# EAGLE board pclone-control (EAGLE 6.6.0)
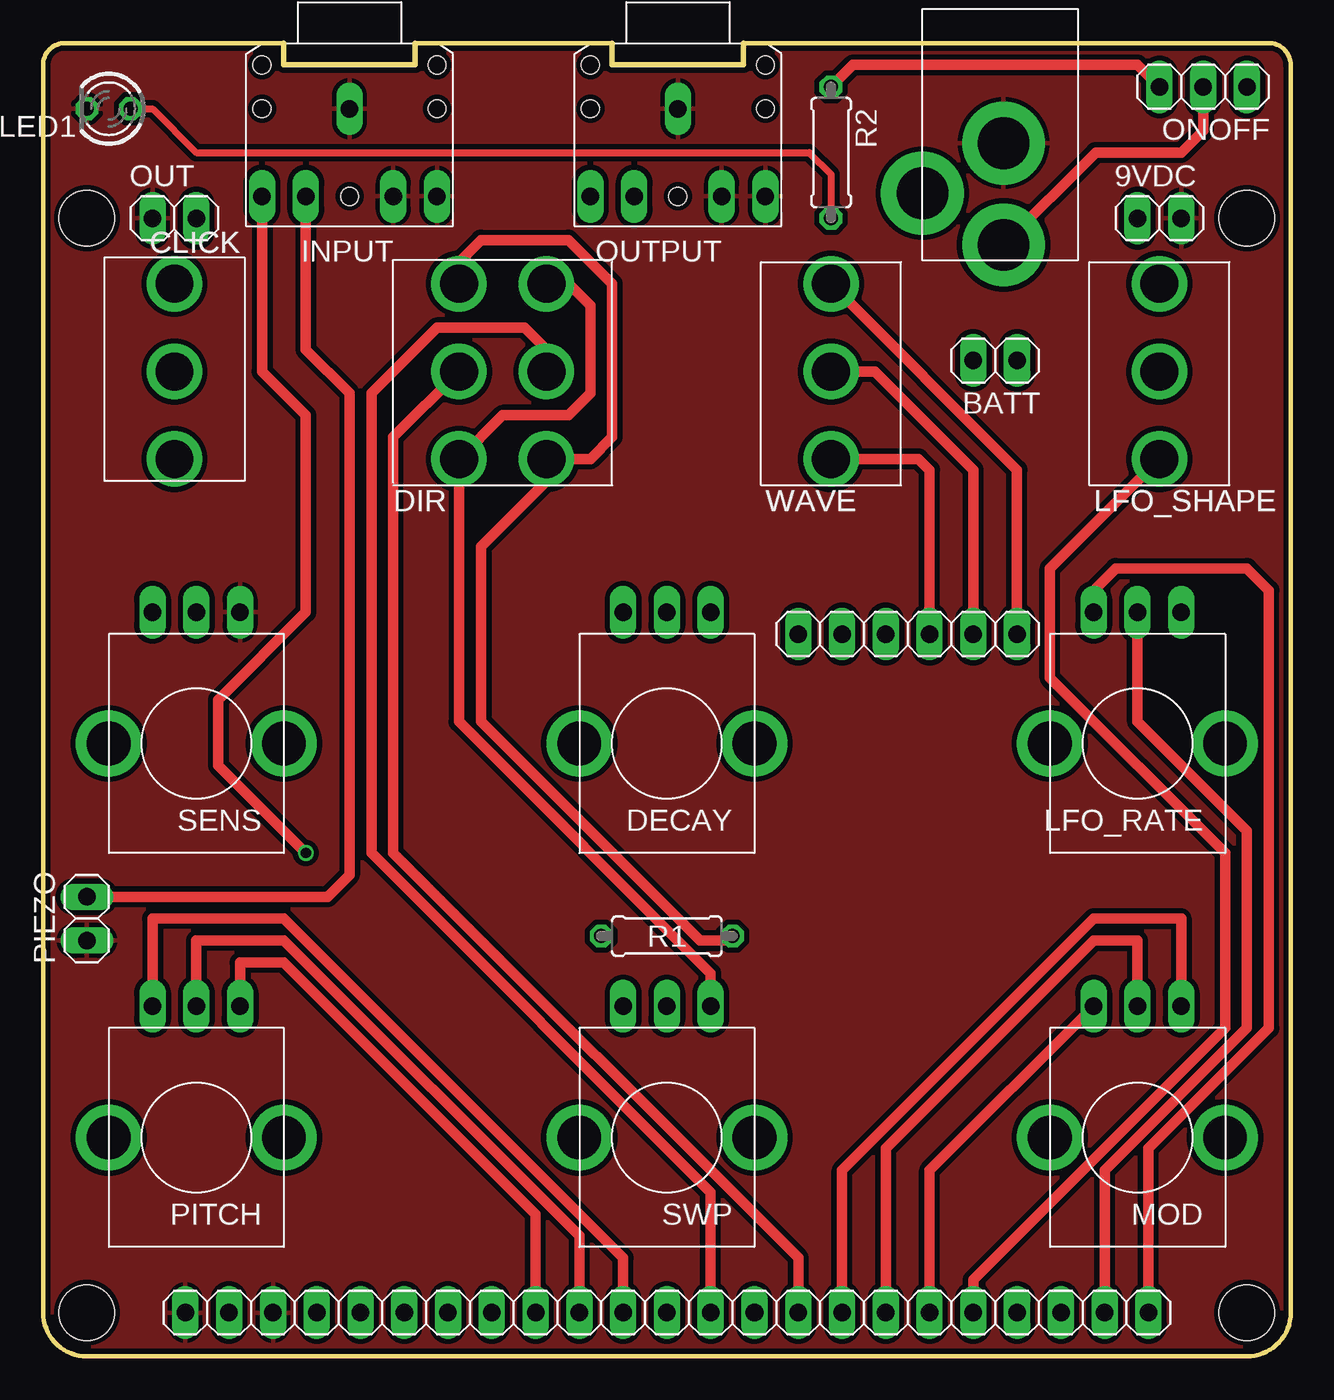
[diagram p0: board, top side]
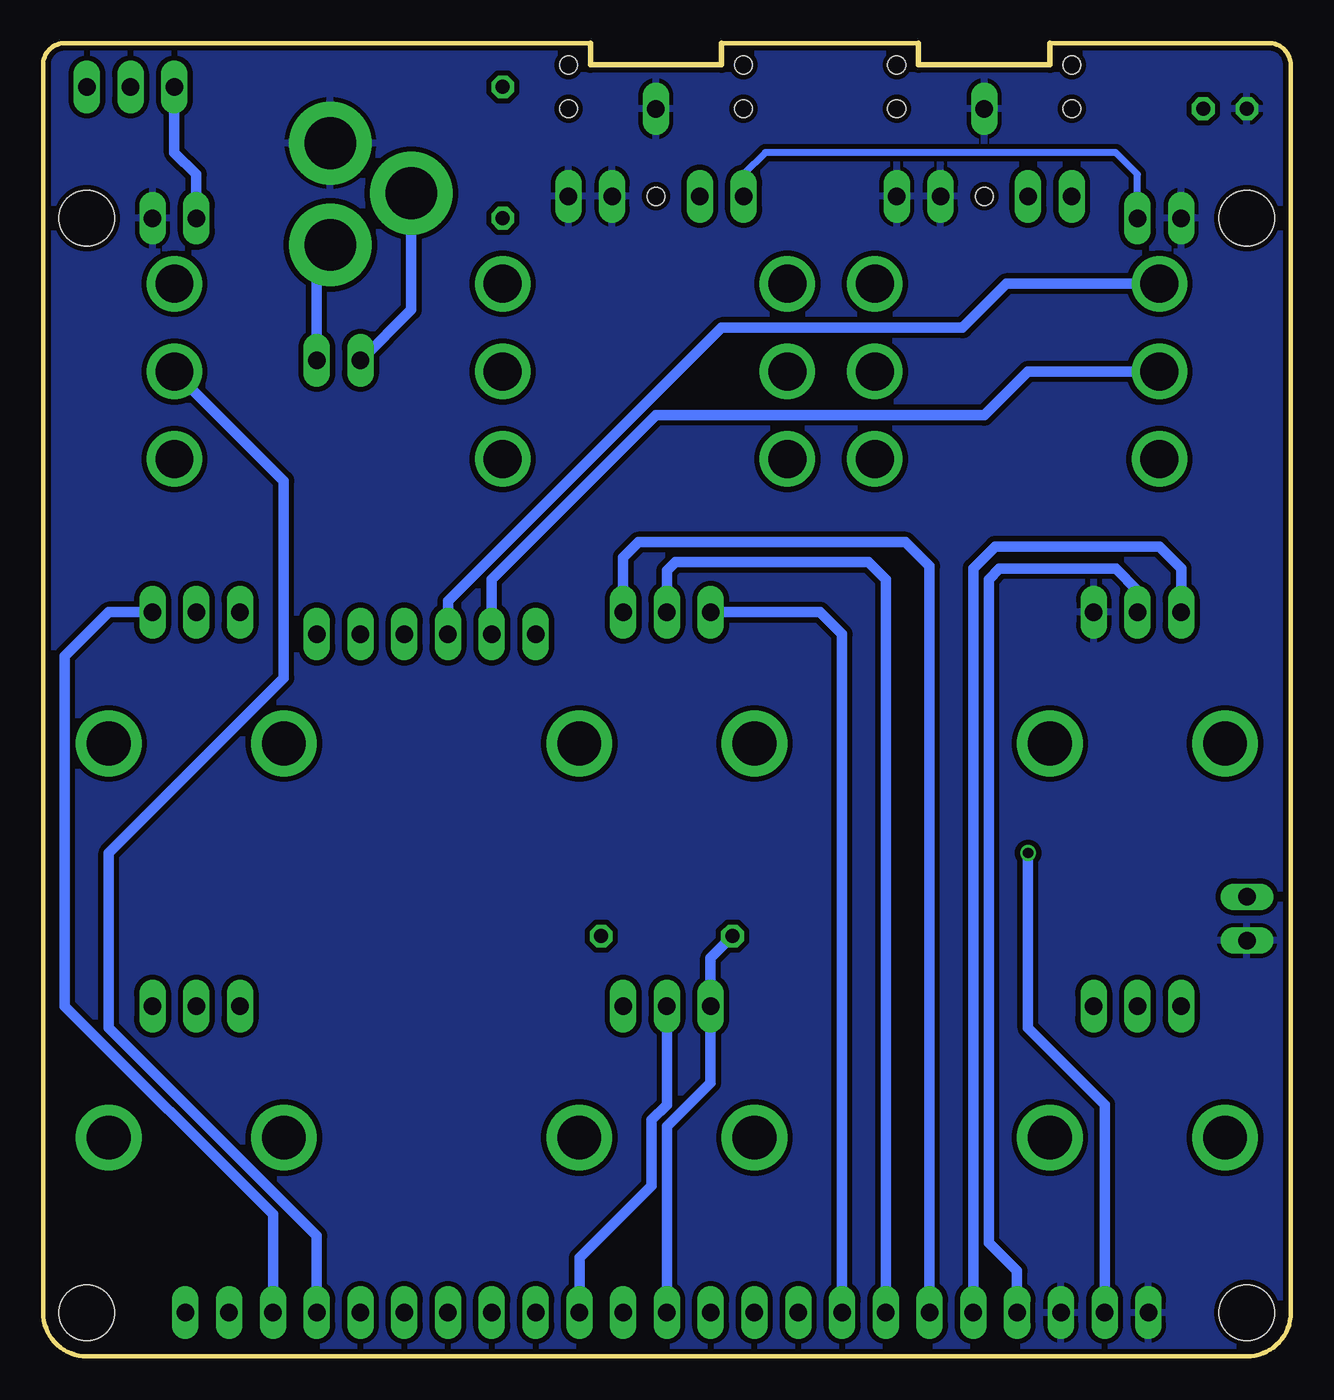
[diagram p1: board, bottom side, seen from below]

Size 72.39 x 76.2 mm. Coordinates in mm from the lower left corner, seen from the top.
Outline: 1.27,76.2 13.97,76.2 13.97,74.93 21.59,74.93 21.59,76.2 33.02,76.2 33.02,74.93 40.64,74.93 40.64,76.2 71.12,76.2 arc-90 72.39,74.93 72.39,2.54 arc-90 69.85,0 2.54,0 arc-90 0,2.54 0,74.93 arc-90 1.27,76.2
Copper layers (1*16): Top 0.035mm / dielectric 1.5mm / Bottom 0.035mm
Design rules "ITEADstudio_DRC": minimum track width 6mil, minimum drill 12mil, track to track 6mil, track to pad 6mil, pad to pad 6mil, via to via 6mil, smd to smd 0mil, copper to edge 10mil, drill to drill 10mil, minimum pad ring 10mil, minimum via ring 6mil, stop-mask expansion 2mil, vias tented up to drill 100mil, thermal gap 10mil
Holes 3.2 mm at 69.85,66.04 69.85,2.54 2.54,2.54 2.54,66.04

## Footprints (pad centres in the part's own frame; a part is rotated, then mirrored left to right if it is on the bottom)
1X02 = drill 1.016 long: 1 -1.27,0; 2 1.27,0
SPDT_SW = drill 2.2: A1 0,5.08; B1 0,-5.08; COM1 0,0
SMALL_ALPS_POT = drill 1.016 long: A -2.54,-7.62; B 2.54,-7.62; W 0,-7.62 | drill 2.54 pad 3.81: GND@1 -5.08,0; GND@2 5.08,0
DPDT_SW = drill 2.2: A1 -2.54,5.08; A2 2.54,5.08; B1 -2.54,-5.08; B2 2.54,-5.08; COM1 -2.54,0; COM2 2.54,0
TRUCONNECTJACK = drill 1.016 long: RING -1.27,-5.08; RING_NC -1.27,-2.54; SLEEVE 3.81,0; TIP -1.27,5.08; TIP_NC -1.27,2.54 | hole 1.016: 3.81,5.08; 6.35,5.08; 3.81,-5.08; 6.35,-5.08; -1.27,0
1X03 = drill 1.016 long: 1 -2.54,0; 2 0,0; 3 2.54,0
1X04 = drill 1.016 long: 1 -3.81,0; 2 -1.27,0; 3 1.27,0; 4 3.81,0
LED3MM = drill 0.813 octagon: A -1.27,0; K 1.27,0
0207/7 = drill 0.813 octagon: 1 -3.81,0; 2 3.81,0
PJ-102A = drill 3 pad 4.8: RING 0.1,-3.39; RING_SW -4.6,-6.29; TIP 0.1,-9.29

## Placement (x,y rotation side)
9VDC  [1X02]  64.77,66.04 0 top
BATT  [1X02]  55.25,57.78 180 top
CLICK  SPDT_SW  [SPDT_SW]  7.62,57.15 180 top
DECAY  ALPS_POT_SMALL  [SMALL_ALPS_POT]  36.2,35.56 180 top
DIR  DPDT_SW  [DPDT_SW]  26.67,57.15 0 top
IN  [1X02]  9.52,2.54 0 top
INPUT  TRUCONNECTJACK  [TRUCONNECTJACK]  17.78,68.58 90 top
J1  [1X03]  15.88,2.54 0 top
J2  [1X03]  23.49,2.54 0 top
J3  [1X03]  31.12,2.54 0 top
J4  [1X04]  40.01,2.54 0 top
J5  [1X03]  48.89,2.54 0 top
J6  [1X02]  55.25,2.54 0 top
J7  [1X03]  61.59,2.54 0 top
J8  [1X03]  46.35,41.91 180 top
J9  [1X03]  53.98,41.91 0 top
LED1  [LED3MM]  3.81,72.39 180 top
LFO_RATE  ALPS_POT_SMALL  [SMALL_ALPS_POT]  63.5,35.56 180 top
LFO_SHAPE  SPDT_SW  [SPDT_SW]  64.77,57.15 0 top
MOD  ALPS_POT_SMALL  [SMALL_ALPS_POT]  63.5,12.7 180 top
ONOFF  [1X03]  67.31,73.66 180 top
OUT  [1X02]  7.62,66.04 0 top
OUTPUT  TRUCONNECTJACK  [TRUCONNECTJACK]  36.83,68.58 90 top
PIEZO  [1X02]  2.54,25.4 90 top
PITCH  ALPS_POT_SMALL  [SMALL_ALPS_POT]  8.89,12.7 180 top
R1  500R  [0207/7]  36.2,24.38 180 top
R2  4k7  [0207/7]  45.72,69.85 270 top
SENS  ALPS_POT_SMALL  [SMALL_ALPS_POT]  8.89,35.56 180 top
SWP  ALPS_POT_SMALL  [SMALL_ALPS_POT]  36.2,12.7 180 top
U$4  2.1MMJACKTHM  [PJ-102A]  55.63,73.79 0 top
WAVE  SPDT_SW  [SPDT_SW]  45.72,57.15 0 top

## Library data of the parts
9VDC BATT IN J1-J9 ONOFF OUT PIEZO = pinhead
CLICK DIR INPUT LFO_SHAPE OUTPUT WAVE = jason_eagle6
DECAY LFO_RATE MOD PITCH SENS SWP = jasons_stuff
LED1 = led
R1 R2 = rcl
U$4 = adafruit

## Nets
GND: 9VDC.2 IN.1 INPUT.RING INPUT.RING_NC INPUT.SLEEVE J1.1 LED1.K OUT.1 OUTPUT.RING OUTPUT.RING_NC OUTPUT.SLEEVE PIEZO.1 SENS.A U$4.RING
N$1: J4.1 R1.2 SWP.B
N$2: DIR.A1 DIR.B2 R1.1
N$3: DIR.A2 DIR.B1 SWP.A
N$4: DIR.COM1 J4.4
N$5: DIR.COM2 J4.2
N$6: J4.3 SWP.W
N$7: J9.1 WAVE.B1
N$8: J9.3 WAVE.A1
N$9: J9.2 WAVE.COM1
N$10: CLICK.B1 J8.1
N$11: CLICK.COM1 J8.2
N$12: J6.1 LFO_SHAPE.B1
N$13: J6.2 LFO_SHAPE.COM1
N$14: J1.2 SENS.W
N$15: BATT.1 ONOFF.2 U$4.TIP
N$16: J1.3 SENS.B
N$17: DECAY.W J2.2
N$18: DECAY.A J2.1
N$19: DECAY.B J2.3
N$20: J5.2 MOD.W
N$21: J5.1 MOD.A
N$22: J5.3 MOD.B
N$23: J3.2 PITCH.W
N$24: J3.1 PITCH.A
N$25: J3.3 PITCH.B
N$26: J7.2 LFO_RATE.W
N$27: J7.3 LFO_RATE.B
N$28: J7.1 LFO_RATE.A
N$29: BATT.2 U$4.RING_SW
N$30: 9VDC.1 ONOFF.3 R2.1
N$31: LED1.A R2.2
N$32: OUT.2 OUTPUT.TIP
N$33: INPUT.TIP_NC PIEZO.2
N$34: IN.2 INPUT.TIP

## Tracks (layer width: path | path; a pad name or v marks a point on that pad's centre or on a via)
GND
  pour Bottom (isolate 0.305): -1.27,76.2 73.66,76.2 73.66,-1.27 -1.27,-1.27
  pour Top (isolate 0.305): -1.27,76.2 -1.27,0 73.66,0 73.66,76.2
N$1
  Bottom 0.61: J4.1 36.2,13.34 33.66,15.88 SWP.B 33.66,23.11 R1.2
N$2
  Top 0.61: R1.1 39.75,24.13 38.1,24.13 25.4,36.83 25.4,46.99 29.21,50.8 DIR.B2 31.75,52.07 33.02,53.34 33.02,62.23 30.48,64.77 25.4,64.77 24.13,63.5 DIR.A1
N$3
  Top 0.61: SWP.A 38.73,22.23 24.13,36.83 DIR.B1 26.67,54.61 30.48,54.61 31.75,55.88 31.75,60.96 30.48,62.23 DIR.A2
N$4
  Top 0.61: J4.4 43.81,5.71 20.32,29.21 20.32,53.34 DIR.COM1
N$5
  Top 0.61: J4.2 38.73,9.53 19.05,29.21 19.05,55.88 22.86,59.69 27.94,59.69 29.21,58.42 DIR.COM2
N$6
  Bottom 0.61: SWP.W 36.2,14.61 37.08,13.72 37.08,9.91 41.27,5.71 J4.3
N$7
  Top 0.61: J9.1 51.44,51.43 50.8,52.07 WAVE.B1
N$8
  Top 0.61: WAVE.A1 56.52,51.43 J9.3
N$9
  Top 0.61: J9.2 53.98,51.43 48.26,57.15 WAVE.COM1
N$10
  Bottom 0.61: CLICK.B1 16.51,62.23 19.05,59.69 33.02,59.69 48.89,43.81 J8.1
N$11
  Bottom 0.61: CLICK.COM1 15.24,57.15 17.78,54.61 36.83,54.61 46.35,45.08 J8.2
N$12
  Top 0.61: J6.1 53.98,4.45 68.58,19.05 68.58,29.21 58.42,39.37 58.42,45.72 LFO_SHAPE.B1
N$13
  Bottom 0.61: J6.2 56.52,6.99 68.58,19.05 68.58,29.21 58.42,39.37 58.42,50.8 LFO_SHAPE.COM1
N$14
  Bottom 0.61: J1.2 15.88,4.95 17.53,6.6 17.53,45.08 16.89,45.72 10.16,45.72 8.89,44.45 SENS.W
N$15
  Top 0.61: 55.75,64.52 U$4.TIP 61.08,69.85 66.04,69.85 67.31,71.12 ONOFF.2
  Bottom 0.61: BATT.1 56.52,63.71 U$4.TIP
N$16
  Bottom 0.61: J1.3 18.41,45.72 17.14,46.99 7.62,46.99 6.35,45.72 SENS.B
N$17
  Bottom 0.61: J2.2 23.49,45.08 24.51,46.1 35.69,46.1 36.2,45.59 DECAY.W
N$18
  Bottom 0.61: J2.1 20.95,45.85 22.35,47.24 37.85,47.24 38.73,46.35 DECAY.A
N$19
  Bottom 0.61: J2.3 26.03,41.91 27.3,43.18 DECAY.B
N$20
  Top 0.61: J5.2 48.89,12.07 60.96,24.13 63.5,24.13 MOD.W
N$21
  Top 0.61: J5.1 46.35,10.79 60.96,25.4 66.04,25.4 MOD.A
N$22
  Top 0.61: J5.3 51.44,10.79 MOD.B
N$23
  Top 0.61: J3.2 31.12,6.99 13.97,24.13 8.89,24.13 PITCH.W
N$24
  Top 0.61: J3.1 28.58,8.26 13.97,22.86 11.43,22.86 PITCH.A
N$25
  Top 0.61: J3.3 33.66,5.71 13.97,25.4 6.35,25.4 PITCH.B
N$26
  Top 0.61: J7.2 61.59,10.79 69.85,19.05 69.85,30.48 63.5,36.83 LFO_RATE.W
N$27
  Top 0.61: J7.3 64.14,12.07 71.12,19.05 71.12,44.45 69.85,45.72 62.23,45.72 60.96,44.45 LFO_RATE.B
N$28
  Bottom 0.61: J7.1 59.05,8.26 71.12,20.32 71.12,40.64 68.58,43.18 LFO_RATE.A
N$29
  Bottom 0.61: U$4.RING_SW 51.03,60.73 BATT.2
N$30
  Top 0.61: R2.1 46.99,74.93 63.5,74.93 ONOFF.3
  Bottom 0.61: 9VDC.1 63.5,68.58 64.77,69.85 ONOFF.3
N$31
  Top 0.406: LED1.A 6.35,72.39 8.89,69.85 44.45,69.85 45.72,68.58 R2.2
N$32
  Bottom 0.406: OUT.2 8.89,68.58 10.16,69.85 30.48,69.85 31.75,68.58 OUTPUT.TIP
N$33
  Top 0.61: INPUT.TIP_NC 15.24,58.42 17.78,55.88 17.78,27.94 16.51,26.67 PIEZO.2
N$34  (via drill 0.6)
  Top 0.61: INPUT.TIP 12.7,57.15 15.24,54.61 15.24,43.18 10.16,38.1 10.16,34.29 v15.24,29.21
  Bottom 0.61: IN.2 10.79,14.61 15.24,19.05 v15.24,29.21